# Altium PCB iDProx.PcbDoc
Units mil, origin at the board's own origin, x right, y up, seen from the top; angles counter-clockwise.
Board outline 1358.27 x 2232.28 mil, 2 copper layers (Top Layer, Bottom Layer), stack 60.8 mil thick; 59 components, 41 nets, 176 pads, 201 vias.
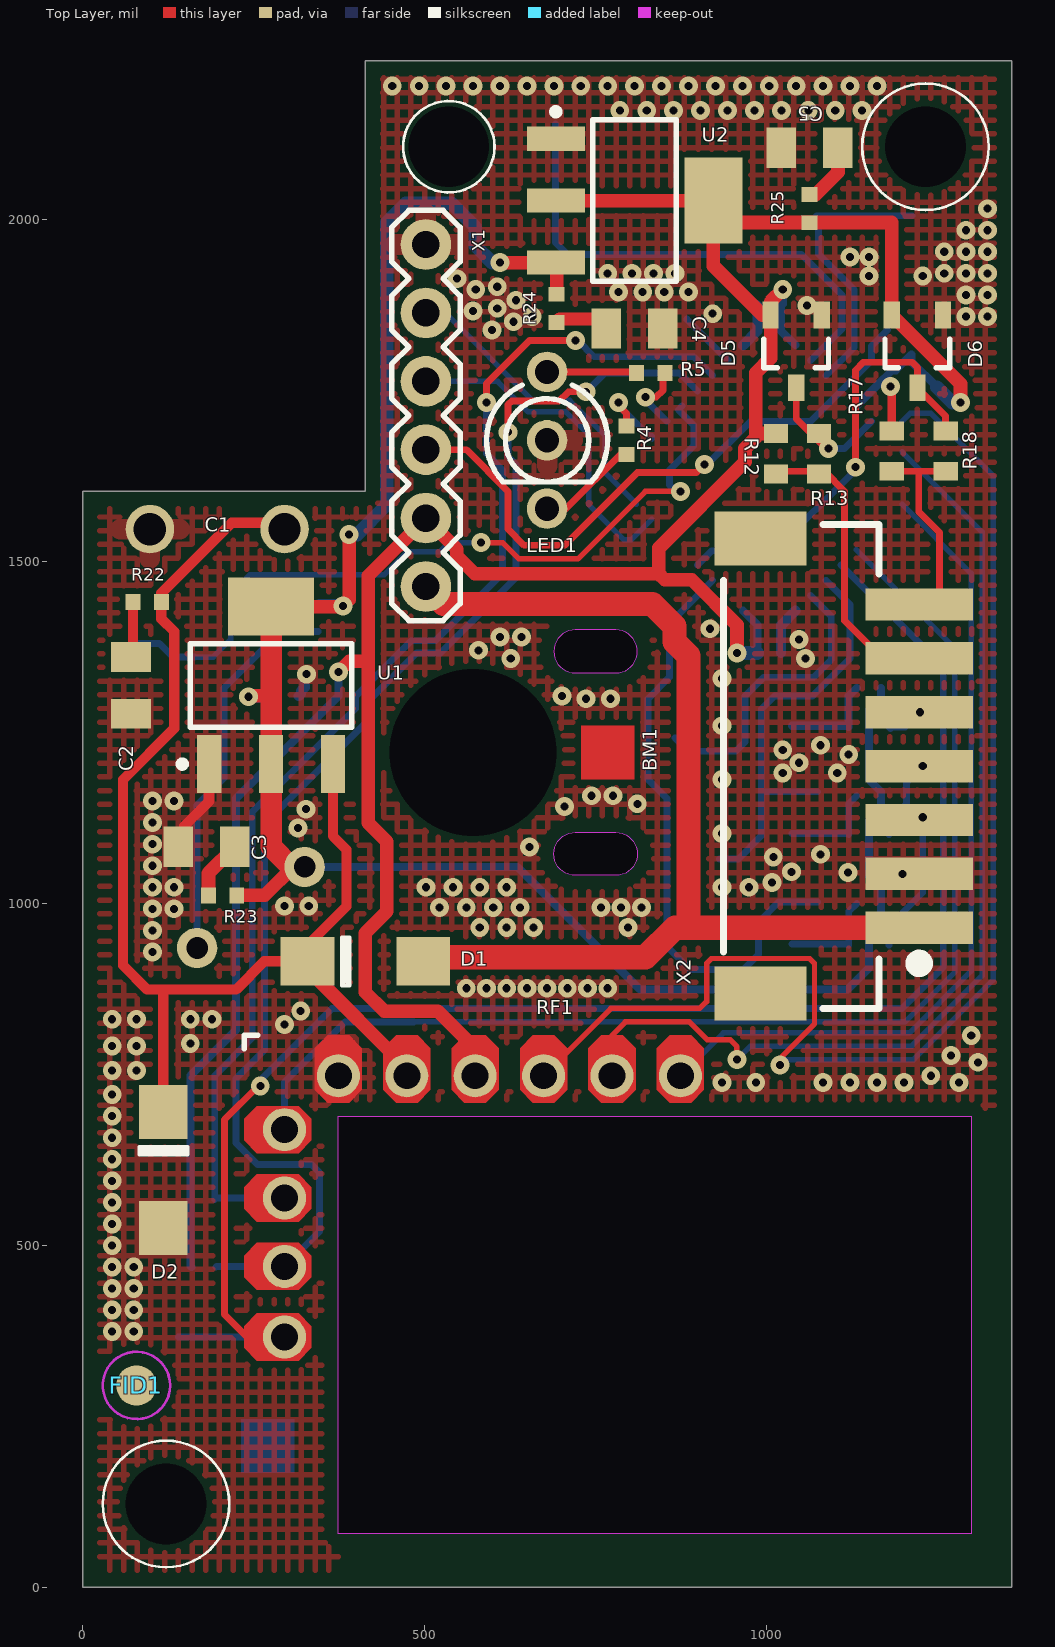
[diagram p0: Top Layer view]
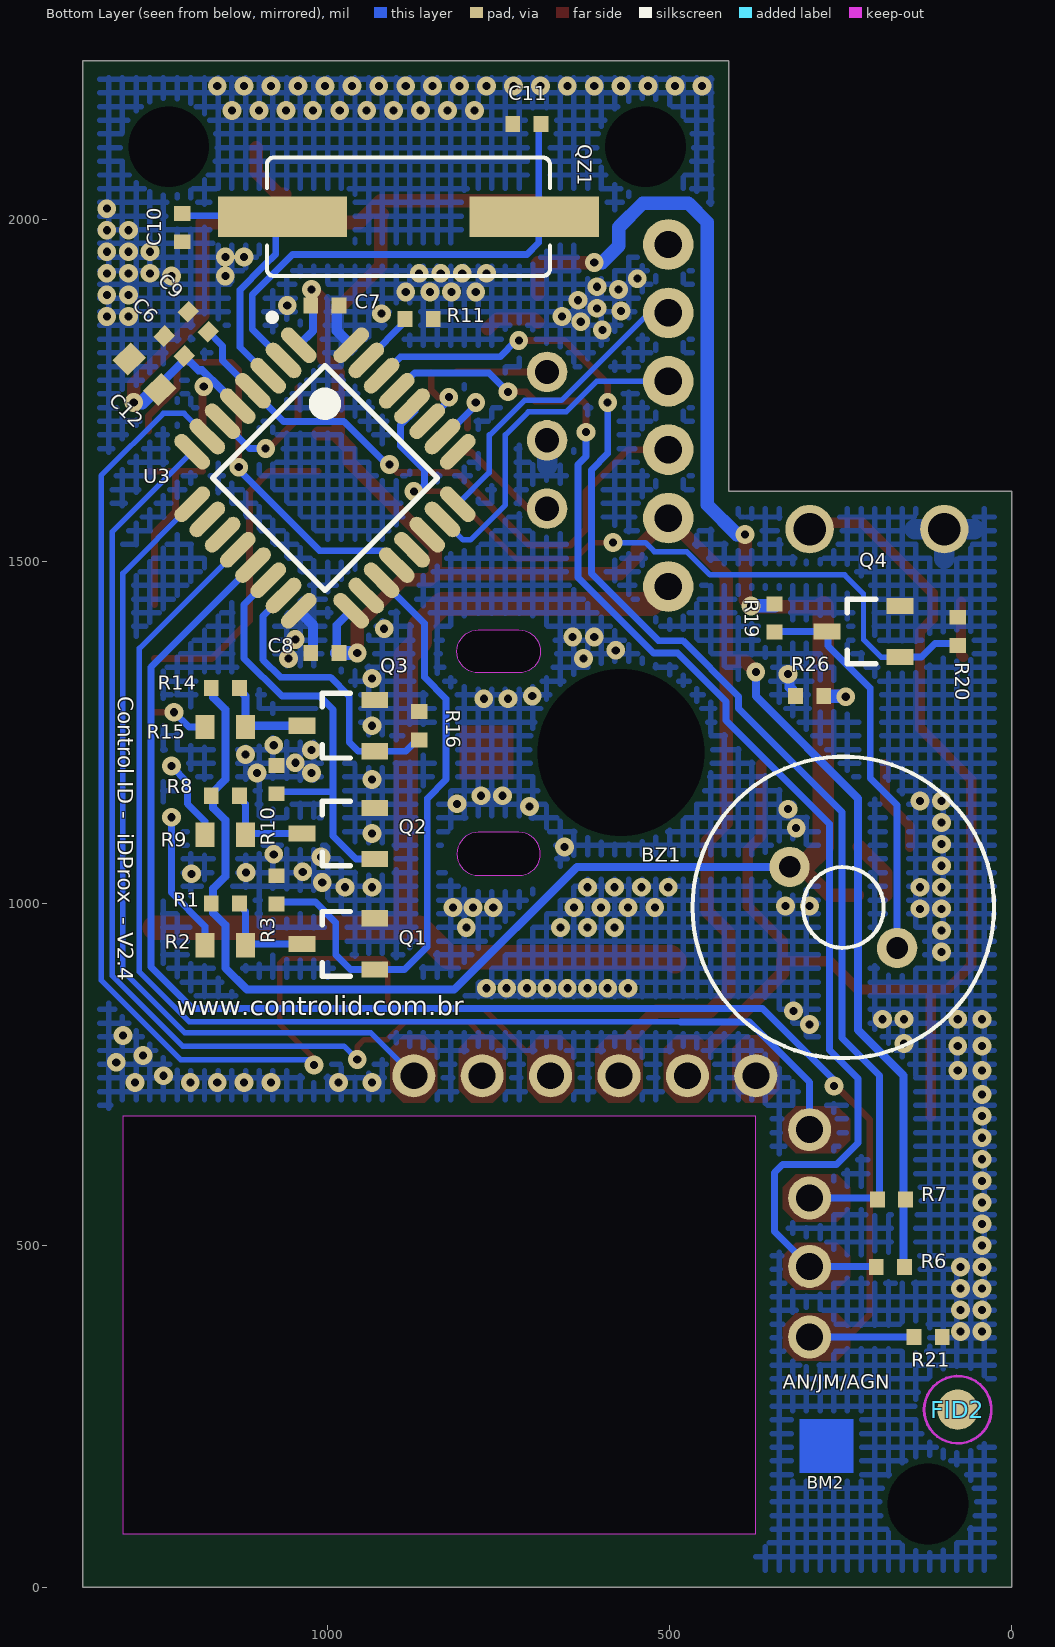
[diagram p1: Bottom Layer view, seen from below]
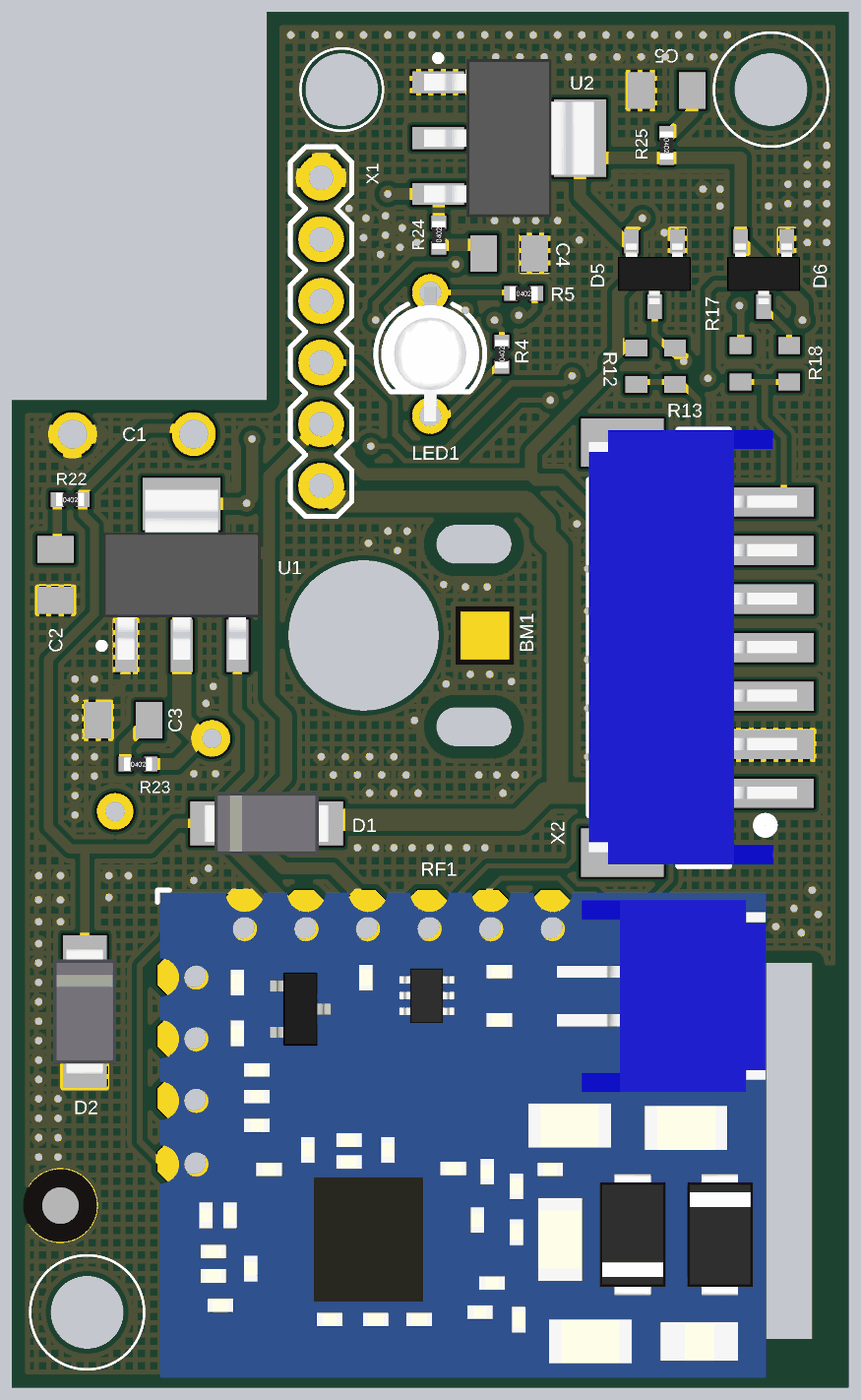
[diagram p2: 3D render of the assembled board from above, using the file's embedded part models]
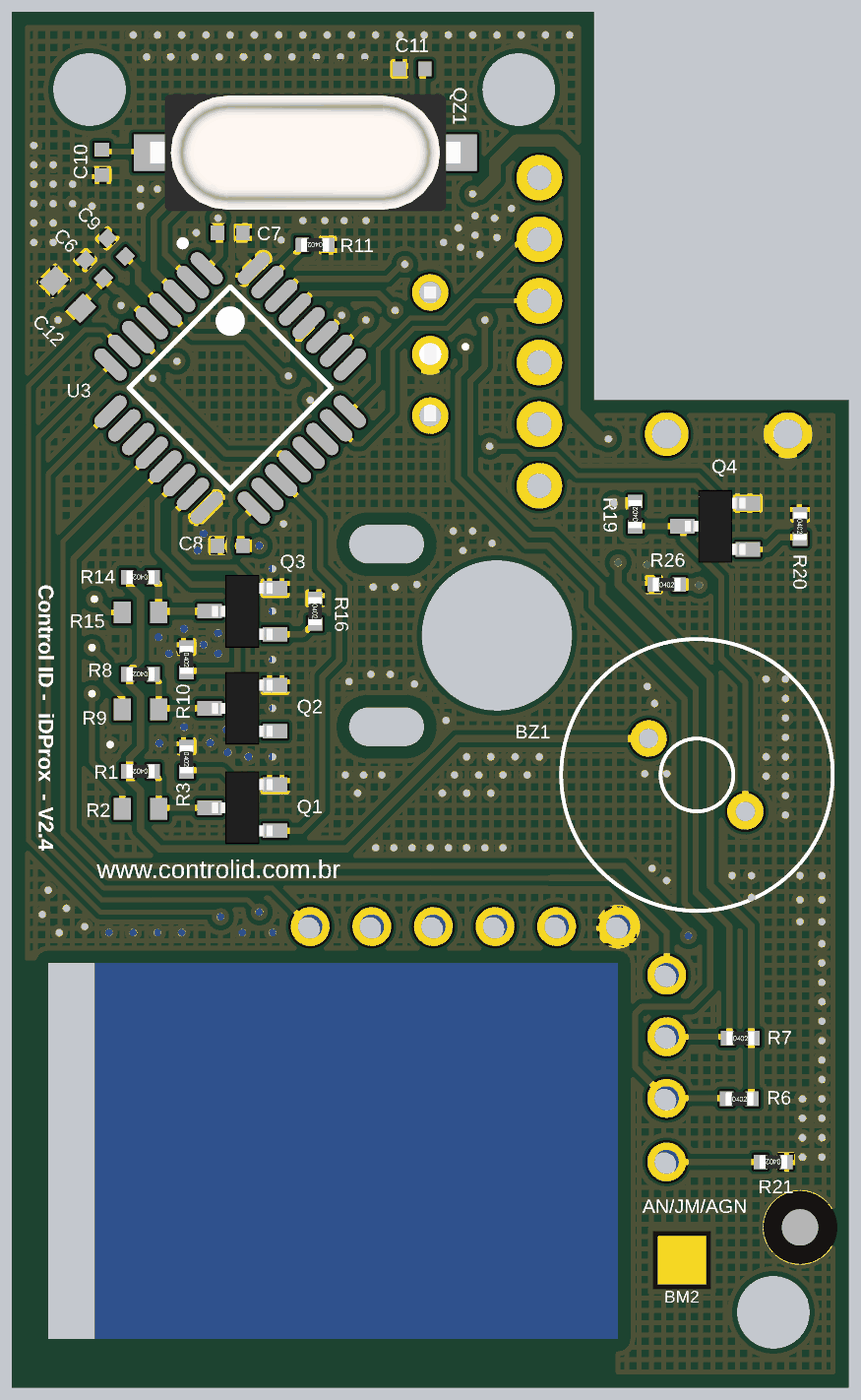
[diagram p3: 3D render of the assembled board from below, using the file's embedded part models]

## Layer stack, top to bottom
Top Solder: solder mask 0.4, Solder Resist, Dk 3.5
Top Layer: signal copper 1.4
Dielectric 1: dielectric 58, FR-4, Dk 4.8
Bottom Layer: signal copper 1.4
Bottom Solder: solder mask 0.4, Solder Resist, Dk 3.5

## Board outline
0,0 0,1602.36 413.39,1602.36 413.39,2232.28 1358.27,2232.28 1358.27,0
cut-out: 1299.21,78.74 374.02,78.74 374.02,688.98 1299.21,688.98
cut-out: 688.98,1368.53 ccw(c720.47,1368.53) 720.47,1337.03 779.53,1337.03 ccw(c779.53,1368.53) 811.02,1368.53 ccw(c779.53,1368.53) 779.53,1400.02 720.47,1400.02 ccw(c720.47,1368.53)
cut-out: 688.98,1072.42 cw(c720.47,1072.42) 720.47,1103.91 779.53,1103.91 cw(c779.53,1072.42) 811.02,1072.42 cw(c779.53,1072.42) 779.53,1040.92 720.47,1040.92 cw(c720.47,1072.42)

## Design rules (kind name [scope] priority, off if disabled: settings)
BoardOutlineClearance [All] p1: gap=19.68 ignorepadtopadclearanceinfootprint=FALSE
Clearance U1 [InComponent('U1') vs InComponent('U1')] p1: gap=0 ignorepadtopadclearanceinfootprint=FALSE
Clearance [All] p2: gap=8 ignorepadtopadclearanceinfootprint=FALSE except(0: Arc-Hole Track-Hole SMDPad-Hole THPad-Hole Via-Hole Fill-Hole Poly-Hole Region-Hole Text-Hole; 10: Poly-Poly Poly-Region Region-Region)
HoleSize [All] p1 off: absolutevalues=TRUE maxlimit=27.56 minlimit=11.81 maxpercent=80.000 minpercent=20.000
MinimumSolderMaskSliver MCU [InComponent('U3')] p1: minsoldermaskwidth=0
MinimumSolderMaskSliver [All] p2: minsoldermaskwidth=2.5
PolygonConnect PolygonConnect_1 [InComponent('BZ1') or InComponent('C1') or InComponent('LED1') or InComponent('X1')] p1: connectstyle=Relief reliefconductorwidth=30 reliefentries=4 polygonreliefangle="90 Angle" airgapwidth=8
PolygonConnect [All] p2: connectstyle=Direct reliefconductorwidth=10 reliefentries=4 polygonreliefangle="90 Angle" airgapwidth=10
RoutingVias [All] p1: holewidth=11.81 width=27.56 viastyle="Through Hole" minholewidth=11.81 minwidth=27.56 maxholewidth=196.85 maxwidth=393.7
SilkToSilkClearance [All] p1: silktosilkclearance=8
SilkToSolderMaskClearance [IsPad] p1: minsilkscreentomaskgap=1 clearancetoexposedcopper=TRUE
SolderMaskExpansion [All] p1: expansion=4
Width [All] p1: maxlimit=196.85 minlimit=7.99 preferedwidth=7.99
26 further rules are at their usual default settings.

## Components (designator, comment, footprint, x,y, rotation, side; value= is the part's Value field where it differs from the comment)
BM1 "BADMARK" BADMARK 767.72,1220.47 r0 top
BM2 "BADMARK" BADMARK 270.67,206.69 r180 bottom
BZ1 "Buzzer" BUZZER 246.06,994.09 r217 bottom locked
C1 "ESK108M016AH2AA" ESK108M016AH2AA 196.85,1551.18 r180 top locked
C2 "Cap0805" C0805 70.87,1318.9 r270 top value=10u
C3 "Cap0805" C0805 181.1,1082.68 r0 top value=10u
C4 "Cap0805" C0805 807.09,1840.55 r0 top value=10u
C5 "Cap0805" C0805 1062.99,2105 r0 top value=10u
C6 "Cap0402" C0402 1224.41,1814.96 r225 bottom value=0.1u
C7 "Cap0402" C0402 1003.94,1874.02 r0 bottom value=0.1u
C8 "Cap0402" C0402 1003.94,1366.14 r180 bottom value=0.1u
C9 "Cap0402" C0402 1188.98,1850.39 r225 bottom value=0.1u
C10 "Cap0402" C0402 1212.6,1988.19 r90 bottom value=10p
C11 "Cap0402" C0402 708.66,2139.76 r180 bottom value=10p
C12 "Cap0603" C0603 1267.72,1773.62 r225 bottom value=4.7u
D1 "B360A-13-F" SMA 413.39,915.35 r0 top
D2 "SMAJ14A" SMA 118.11,610.24 r270 top
D5 "BAT54S" SOT23-3 1043.31,1807.09 r270 top
D6 "BAT54S" SOT23-3 1220.47,1807.09 r270 top
FID1 "FIDUCIAL" FIDUCIAL-1p5X3 78.74,295.28 r90 top
FID2 "FIDUCIAL" FIDUCIAL-1p5X3 78.74,259.84 r90 bottom
LED1 "LTL1BEKVJNN" LTL1BEKVJNN 679.13,1677.17 r0 top locked
Q1 "DMN3404" SOT23-3 984.25,940.94 r0 bottom
Q2 "DMN3404" SOT23-3 984.25,1102.36 r0 bottom
Q3 "DMN3404" SOT23-3 984.25,1259.84 r0 bottom
Q4 "DMN3404" SOT23-3 216.54,1397.64 r0 bottom
QZ1 "CrystalHC49" HC49 881.89,2003.94 r0 bottom
R1 "Res0402" R0402 1149.61,1000 r0 bottom value=1k
R2 "Res0603" R0603 1122.05,921.26 r180 bottom value=100
R3 "Res0402" R0402 1074.8,1019.68 r270 bottom value=1K
R4 "Res0402" R0402 795.28,1677.17 r90 top value=120
R5 "Res0402" R0402 830.71,1775.59 r0 top value=130
R6 "Res0402" R0402 177.17,468.5 r180 bottom value=DNP
R7 "Res0402" R0402 175.59,566.93 r180 bottom value=DNP
R8 "Res0402" R0402 1149.61,1157.48 r0 bottom value=1k
R9 "Res0603" R0603 1122.05,1082.68 r180 bottom value=100
R10 "Res0402" R0402 1074.8,1181.1 r270 bottom value=1K
R11 "Res0402" R0402 866.14,1854.33 r0 bottom value=1k
R12 "Res0603" R0603 1031.5,1685.04 r90 top value=100k
R13 "Res0603" R0603 1094.49,1685.04 r90 top value=100k
R14 "Res0402" R0402 1149.61,1314.96 r0 bottom value=1k
R15 "Res0603" R0603 1122.05,1240.16 r180 bottom value=100
R16 "Res0402" R0402 866.14,1259.84 r270 bottom value=1K
R17 "Res0603" R0603 1200.79,1688.98 r90 top value=100k
R18 "Res0603" R0603 1279.53,1688.98 r90 top value=100k
R19 "Res0402" R0402 346.46,1417.32 r90 bottom value=1k
R20 "Res0402" R0402 78.74,1397.64 r270 bottom value=1K
R21 "Res0402" R0402 122.05,366.14 r0 bottom value=3k3
R22 "Res0402" R0402 94.49,1440.94 r0 top value=1
R23 "Res0402" R0402 204.72,1011.81 r0 top value=1
R24 "Res0402" R0402 692.91,1870.08 r90 top value=1
R25 "Res0402" R0402 1062.99,2015.75 r270 top value=1
R26 "Res0402" R0402 295.28,1303.15 r180 bottom value=430
RF1 "REPASK/REPMIF" REPASK_REPMIF 1220.47,807.09 r180 top locked
U1 "NCP1117LPST50T3G" SOT223 275.59,1318.9 r90 top
U2 "AP1117E33G-13" SOT223 807.09,2027.56 r0 top
U3 "STM32F030K6T6" STM-LQFP32_N 1003.94,1622.05 r225 bottom locked
X1 "Header 6" 1X06 501.97,1663.39 r90 top
X2 "JST7_HORIZ" JST7_HORIZ 1102.36,1200.79 r90 top locked

## Footprints (in the part's own frame and the unit in brackets; to place one, negate y for a bottom-side part, rotate by r counter-clockwise, add the part's x,y. Pads: shape width x height; smd on the part's side, far side on the other; paste and mask are expansions set on the pad)
1X06 [mil]
  round 74 hole 40: 1(-200,0) 2(-100,0) 3(0,0) 4(100,0) 5(200,0) 6(300,0)
  silkscreen extent -250,-50 350,50
BADMARK [mil]
  Top Layer region: -39.37,-39.37 39.37,-39.37 39.37,39.37 -39.37,39.37
BUZZER [mil]
  round 59.06 hole 31.5: 1(-98.43,0) 2(98.43,0)
  silkscreen extent -220,-220 220,220, body extent -240,-240 240,240, height 197
C0402 [mm] "Chip Capacitor, 2-Leads, Body 1,00x0,50mm, IPC Medium Density"
  rect 0.55x0.6 smd: 1(-0.525,0) 2(0.525,0)
  body extent -0.53,-0.28 0.53,0.27, height 0.55
C0603 [mm] "Chip Capacitor, 2-Leads, Body 1,60x0,80mm, IPC Medium Density"
  rect 0.8x0.95 smd: 1(-0.8,0) 2(0.8,0)
  body extent -0.85,-0.45 0.85,0.45, height 0.9
C0805 [mm] "Chip Capacitor, 2-Leads, Body 2,00x1,25mm, IPC Medium Density"
  rect 1.1x1.5 smd: 1(-1.05,0) 2(1.05,0)
  body extent -1.1,-0.72 1.1,0.72, height 1.25
ESK108M016AH2AA [mm] "CAP ALUM 1000UF 20% 16V RADIAL"
  round 1.8 hole 1.2: 1(-2.5,0.1) 2(2.5,0.1)
  body extent -4,-14 4,-2, height 4
FIDUCIAL-1p5X3 [mil]
  rrect100% 59.06x59.06 smd: 1(0,0)
HC49 [mm]
  rect 4.8x1.5 smd: 1(-4.675,0) 2(4.675,0)
  silkscreen extent -5.25,-2.2 5.25,2.2, body extent -6.4,-2.41 6.4,2.42, height 4.3
JST7_HORIZ [mm]
  rect 1.2x4 smd: 1(-6,-3.075) 2(-4,-3.075) 3(-2,-3.075) 4(0,-3.075) 5(2,-3.075) 6(4,-3.075) 7(6,-3.075)
  rect 2x3.4 smd: P1(-8.45,2.825) P2(8.45,2.825)
  silkscreen extent -9,-3.33 8.97,4.2, body extent -8.93,-4.39 8.97,4.21, height 5.5
LTL1BEKVJNN [mm] "LED GRN/RED DIFF 3MM ROUND T/H"
  round 1.5 hole 0.9: 1(0,-2.54) 2(0,0) 3(0,2.54)
  silkscreen extent -2.25,-1.55 2.25,2.05, body extent -2.02,-2.79 2.02,2.79, height 7.51
R0402 [mm] "Chip Resistor, 2-Leads, Body 1,00x0,50mm, IPC Medium Density"
  rect 0.55x0.6 smd: 1(-0.525,0) 2(0.525,0)
  body extent -0.57,-0.27 0.58,0.28, height 0.41
R0603 [mm] "Chip Resistor, 2-Leads, Body 1.60x0.80mm, IPC Medium Density"
  rect 0.7x0.9 smd: 1(-1.45,0.45) 2(0.05,0.45)
  body extent -1.55,0 0.15,0.9, height 0.45
REPASK_REPMIF [mm]
  round 1.6 hole 1: 1(18.96,1.5) 2(16.42,1.5) 3(23.5,3.5) 4(23.5,6.04) 5(23.5,8.58) 6(23.5,11.2) 7(13.88,1.5) 8(11.34,1.5) 9(8.8,1.5) 10(21.5,1.5)
  Top Layer region: 10.94,0 11.74,0 12.215,0.475 12.215,2.025 11.74,2.5 10.94,2.5 10.465,2.025 10.465,0.475
  Top Layer region: 13.48,0 14.28,0 14.755,0.475 14.755,2.025 14.28,2.5 13.48,2.5 13.005,2.025 13.005,0.475
  Top Layer region: 16.02,0 16.82,0 17.295,0.475 17.295,2.025 16.82,2.5 16.02,2.5 15.545,2.025 15.545,0.475
  Top Layer region: 18.56,0 19.36,0 19.835,0.475 19.835,2.025 19.36,2.5 18.56,2.5 18.085,2.025 18.085,0.475
  Top Layer region: 21.1,0 21.9,0 22.375,0.475 22.375,2.025 21.9,2.5 21.1,2.5 20.625,2.025 20.625,0.475
  Top Layer region: 25,3.1 25,3.9 24.525,4.375 22.975,4.375 22.5,3.9 22.5,3.1 22.975,2.625 24.525,2.625
  Top Layer region: 25,5.64 25,6.44 24.525,6.915 22.975,6.915 22.5,6.44 22.5,5.64 22.975,5.165 24.525,5.165
  Top Layer region: 25,8.18 25,8.98 24.525,9.455 22.975,9.455 22.5,8.98 22.5,8.18 22.975,7.705 24.525,7.705
  Top Layer region: 25,10.8 25,11.6 24.525,12.075 22.975,12.075 22.5,11.6 22.5,10.8 22.975,10.325 24.525,10.325
  Top Layer region: 8.4,0 9.2,0 9.675,0.475 9.675,2.025 9.2,2.5 8.4,2.5 7.925,2.025 7.925,0.475
  silkscreen extent 24.5,0 25,0.5, body extent -0.1,0.04 24.9,20.1, height 9.7
SMA [mm]
  rect 2x1.8 smd: 1(2.15,0) 2(-2.15,0)
  silkscreen extent -0.88,-0.9 -0.58,0.9, body extent -2.6,-1.3 2.6,1.3, height 2.45
SOT23-3 [mm]
  rect 1x0.6 smd: 1(1.35,0) 2(-1.35,0.95) 3(-1.35,-0.95)
  silkscreen extent -0.45,-1.2 0.6,1.2, body extent -1.25,-1.5 1.25,1.5, height 1.1
SOT223 [mm] "SOT223, 4-Leads, Body 6,50x7,00mm (avg), Pitch 2,30mm, IPC Medium Density"
  rect 2.15x0.9 smd: 1(-2.925,2.3) 2(-2.925,0) 3(-2.925,-2.3)
  rect 2.15x3.2 smd: 2(2.925,0)
  silkscreen extent -3.05,-3 1.55,3.42, body extent -3.5,-3.25 3.5,3.25, height 1.65
STM-LQFP32_N [mm] "QFP, 32-Leads, Body 7x7mm, Pitch 0.8mm, IPC Medium Density"
  oval 1.65x0.55 smd: 1(-4.175,2.8) 2(-4.175,2) 3(-4.175,1.2) 4(-4.175,0.4) 5(-4.175,-0.4) 6(-4.175,-1.2) 7(-4.175,-2) 8(-4.175,-2.8) 17(4.175,-2.8) 18(4.175,-2) 19(4.175,-1.2) 20(4.175,-0.4) 21(4.175,0.4) 22(4.175,1.2) 23(4.175,2) 24(4.175,2.8)
  oval 0.55x1.65 smd: 9(-2.8,-4.175) 10(-2,-4.175) 11(-1.2,-4.175) 12(-0.4,-4.175) 13(0.4,-4.175) 14(1.2,-4.175) 15(2,-4.175) 16(2.8,-4.175) 25(2.8,4.175) 26(2,4.175) 27(1.2,4.175) 28(0.4,4.175) 29(-0.4,4.175) 30(-1.2,4.175) 31(-2,4.175) 32(-2.8,4.175)
  silkscreen extent -5.73,-2.95 2.95,2.96, body extent -3.5,-3.5 3.5,3.5, height 1.6

## Part data
BM1 BM2: "Bad Mark Indicator"
BZ1: "Standard PTH Buzzer"
C1: "CAP ALUM 1000UF 20% 16V RADIAL", Capacitance=1000µF, ESR (Equivalent Series Resistance)=-, Lifetime @ Temp.="2000 Hrs @ 85°C", Manufacturer=Kemet, Operating Temperature="-40°C ~ 85°C", Package / Case="Radial, Can", Ripple Current="630mA @ 120Hz", Supplier Part Number 1=399-6106-ND, Tolerance=±20%, Voltage Rating=16V, Applications="General Purpose", Category=Capacitors, ComponentLink1Description=http://capacitoredge.kemet.com/capedge2/DataSheet?pn=ESK108M016AH2AA, ComponentLink1URL=http://capacitoredge.kemet.com/capedge2/DataSheet?pn=ESK108M016AH2AA, Height - Seated (Max)="0.669\" (17.00mm)", Impedance=-, Lead Spacing="0.197\" (5.00mm)", Manufacturer Part Number=ESK108M016AH2AA, Mounting Type="Through Hole", Packaging=Bulk, Polarization=Polar, Pricing 1="1=0.43, 10=0.298, 50=0.2086, 100=0.1788, 250=0.149, 500=0.1341, 1000=0.11324, 2500=0.10728, 5000=0.10132 (USD)", RoHS="RoHS Compliant", Size / Dimension="0.394\" Dia (10.00mm)", Stock 1=2866, Supplier 1=Digi-Key, Surface Mount Land Size=-
C2 C3 C4 C5 C6 C7 C8 C9 C10 C11 C12: "Capacitor", Tolerance=10%
  C2 C3 C4 C5: MAX VDC=25V
  C6 C7 C8 C9 C10 C11: MAX VDC=10V
  C12: MAX VDC=6.3V
D1: library part B360A, "B360A Diode", Capacitance @ Vr, F="200pF @ 4V, 1MHz", Current - Average Rectified (Io)=3A, Current - Reverse Leakage @ Vr="500µA @ 60V", Manufacturer="Diodes Incorporated", Operating Temperature - Junction="-55°C ~ 150°C", Package / Case="DO-214AC, SMA", Supplier Device Package=SMA, Supplier Part Number 1=B360A-FDICT-ND, Voltage - DC Reverse (Vr) (Max)=60V, Voltage - Forward (Vf) (Max) @ If="700mV @ 3A", Category="Discrete Semiconductor Products", ComponentLink1Description=http://www.diodes.com/_files/datasheets/ds30891.pdf, ComponentLink1URL=http://www.diodes.com/_files/datasheets/ds30891.pdf, Diode Type=Schottky, Manufacturer Part Number=B360A-13-F, Mounting Type="Surface Mount", Packaging="Cut Tape (CT)", Pricing 1="1=0.5, 10=0.394, 25=0.3324, 100=0.2708, 250=0.22424, 500=0.18526, 1000=0.13875, 2500=0.1275 (USD)", Reverse Recovery Time (trr)=-, RoHS="RoHS Compliant", Speed="Fast Recovery =< 500ns, > 200mA (Io)", Stock 1=132804, Supplier 1=Digi-Key
D2: "TVS DIODE 14VWM 23.2VC SMA", Capacitance @ Frequency=-, Current - Peak Pulse (10/1000µs)=17.2A, Manufacturer="Littelfuse Inc.", Operating Temperature="-55°C ~ 150°C (TJ)", Package / Case="DO-214AC, SMA", Power - Peak Pulse=400W, Power Line Protection=No, Supplier Device Package="DO-214AC (SMA)", Supplier Part Number 1=SMAJ14ALFCT-ND, Voltage - Breakdown (Min)=15.6V, Voltage - Clamping (Max) @ Ipp=23.2V, Voltage - Reverse Standoff (Typ)=14V, Applications="General Purpose", Bidirectional Channels=-, Category="Circuit Protection", ComponentLink1Description=http://www.littelfuse.com/~/media/electronics/datasheets/tvs_diodes/littelfuse_tvs_diode_smaj_datasheet.pdf.pdf, ComponentLink1URL=http://www.littelfuse.com/~/media/electronics/datasheets/tvs_diodes/littelfuse_tvs_diode_smaj_datasheet.pdf.pdf, Manufacturer Part Number=SMAJ14A, Mounting Type="Surface Mount", Packaging="Cut Tape (CT)", Pricing 1="1=0.43, 10=0.36, 25=0.3156, 100=0.2701, 250=0.23424, 500=0.1984, 1000=0.15295, 2500=0.13984 (USD)", RoHS="RoHS Compliant", Stock 1=42648, Supplier 1=Digi-Key, Type=Zener, Unidirectional Channels=1
D5 D6: "DIODE ARRAY SCHOTTKY 30V SOT23"
FID1 FID2: "Standard fiducial for Control iD boards"
LED1: "LED GRN/RED DIFF 3MM ROUND T/H", Color="Green, Red", Current - Test="20mA Green, 20mA Red", Lens Color=White, Manufacturer="Lite-On Inc.", Millicandela Rating="110mcd Green, 110mcd Red", Package / Case="Radial - 3 Leads", Supplier Device Package=-, Supplier Part Number 1=160-1939-ND, Voltage - Forward (Vf) (Typ)="2.1V Green, 2V Red", Category=Optoelectronics, ComponentLink1Description=http://optoelectronics.liteon.com/upload/download/DS20-2001-645/S_110_LTL1BEKVJNN.pdf, ComponentLink1URL=http://optoelectronics.liteon.com/upload/download/DS20-2001-645/S_110_LTL1BEKVJNN.pdf, Features=-, Height (Max)=5.15mm, Lens Style/Size="Round with Domed Top, 3.00mm", Lens Transparency=Diffused, Manufacturer Part Number=LTL1BEKVJNN, Mounting Type="Through Hole", Packaging=Bulk, Pricing 1="1=0.47, 10=0.332, 100=0.2216, 250=0.18004, 500=0.13296, 1000=0.1108, 2500=0.09972, 5000=0.09418, 10000=0.08587 (USD)", RoHS="RoHS Compliant", Size / Dimension=-, Stock 1=19364, Supplier 1=Digi-Key, Viewing Angle=45°, Wavelength - Dominant="572nm Green, 631nm Red", Wavelength - Peak="575nm Green, 639nm Red"
Q1 Q2 Q3 Q4: "DMN3404 N-Channel MOSFET", Supplier Part Number 1=DMN3404LDICT-ND, Supplier 1=Digi-Key
R1 R2 R3 R4 R5 R6 R7 R8 R9 R10 R11 R12 R13 R14 R15 R16 R17 R18 R19 R20 R21 R22 R23 R24 R25 R26: "Resistor", Tolerance=5%
RF1: "Control iD RF Module"
U1: "IC REG LDO 5V 1A SOT223", Current - Limit (Min)=1.1A, Current - Output=1A, Manufacturer="ON Semiconductor", Operating Temperature="0°C ~ 125°C", Package / Case="TO-261-4, TO-261AA", Supplier Device Package=SOT-223, Supplier Part Number 1=NCP1117LPST50T3GOSCT-ND, Voltage - Dropout (Typical)="1.3V @ 1A", Voltage - Input="Up to 18V", Voltage - Output=5V, Category="Integrated Circuits (ICs)", ComponentLink1Description=http://www.onsemi.com/pub_link/Collateral/NCP1117LP-D.PDF, ComponentLink1URL=http://www.onsemi.com/pub_link/Collateral/NCP1117LP-D.PDF, Manufacturer Part Number=NCP1117LPST50T3G, Mounting Type="Surface Mount", Number of Regulators=1, Packaging="Cut Tape (CT)", Pricing 1="1=0.45, 10=0.362, 100=0.2468, 500=0.18476, 1000=0.13838 (USD)", Regulator Topology="Positive Fixed", RoHS="RoHS Compliant", Stock 1=6004, Supplier 1=Digi-Key
U3: "ARM Cortex-M0 32-bit MCU, 32 KB Flash, 4 KB Internal RAM, 26 I/Os, 32-pin LQFP, -40 to 85 degC, Tray", I/Os (High Current)=26, Operating Frequency(F) (Processor speed) (MHz)=48, Supplier Part Number 1=497-14046-ND, Supply Voltage(Vcc) min (V)=2.4, ComponentLink1Description="Manufacturer URL", ComponentLink1URL=http://www.st.com/web/en/home.html, ComponentLink2Description=Datasheet, ComponentLink2URL=http://www.st.com/st-web-ui/static/active/en/resource/technical/document/datasheet/DM00088500.pdf, ComponentLink3Description="Package Specification", ComponentLink3URL=http://www.st.com/st-web-ui/static/active/en/resource/technical/document/datasheet/DM00088500.pdf, Core="ARM Cortex-M0", DatasheetVersion="Rev. 1", FLASH Size (Prog) (kB)=32, Internal RAM Size (kB)=4, Mounting Technology="Surface Mount", PackageDescription="32-Pin Low Profile Quad Flat Package, 7 x 7 mm Body, 0.8 mm Pitch", PackageReference=LQFP32, PackageVersion="Rev. 1, 07/2013", Packing=Tray, PartNumber=STM32F030K6T6, Supplier 1=Digi-Key, Supplier 2=Newark, Supplier 3=Mouser, Supplier Part Number 2=19X6194, Supplier Part Number 3=511-STM32F030K6T6
X1: "Header, 6-Pin, Single row, 0.1\""

## Free pads (board coordinates)
  round 0 hole 118.11 unplated: 2(122.05,122.05) 2(535.43,2106.3) 2(1232.28,2106.3)
  round 0 hole 244.09 unplated: 2(570.87,1220.47)

## Via types
v1: diameter 27.56, hole 11.81, Top Layer to Bottom Layer, tented both sides, 201 vias

## Nets (pads, with @x,y where several pads share a name; then routed paths per layer and width w, separated by ;. In a path a pad name is that pad's centre, name@x,y a point inside that pad or via, vN(x,y) a via of type N, cw(c..) or ccw(c..) an arc to the next point about the centre after c; other vN are vias at no path point)
5V: BZ1.1 R1.2 R8.2 R14.2 R19.2 R23.2 R24.2 R26.2 U1.2 U2.3 | length 3031.4
  Top Layer w19.68: R23.2 266.3,1011.81 307.82,1053.33 BZ1.1 ; v1(242.5,1302.15) 244,1303.66 265.27,1303.66 275.59,1313.98 ; U1.2@275.59,1434.06 379.92,1434.06 v1(380.91,1435.04) 389.76,1443.9 v1(389.76,1539.37) ; v1(610.24,1937.01) U2.3 692.91,1936.02 R24.2
  Top Layer w31.5: U1.2@275.59,1434.06 275.59,1313.98 275.59,1203.74 275.59,1082.68 304.94,1053.33 BZ1.1@307.82,1053.33
  Bottom Layer w11.81: BZ1.1 635.65,1053.33 814.96,874.02 1118.11,874.02 1149.61,905.51 1149.61,968.5 1167.32,986.22 1167.32,1021.65 1149.61,1039.37 1149.61,1122.05 1167.32,1139.76 1167.32,1163.37 1149.61,1181.08 1149.61,1283.46 1167.32,1301.18 R14.2@1167.32,1314.96
  Bottom Layer w19.68: v1@243.5,1303.15 R26.2 ; R19.2@346.46,1435.04 v1(380.91,1435.04) ; v1(389.76,1539.37) 401.57,1539.37 444.88,1582.68 444.88,1996.06 472.44,2023.62 539.37,2023.62 574.05,1988.94 574.05,1961.55 598.59,1937.01 v1(610.24,1937.01)
125KHZ: RF1.3 U3.12 | length 1792.9
  Bottom Layer w8: 484.25,826.77 1202.2,826.77 1275.34,899.91 1275.34,1372.92 U3.12
  Bottom Layer w10: RF1.3 295.28,738.6 383.44,826.77 484.25,826.77
+3V3: C6.2 C7.2 C8.2 C12.2 D5.3 D6.3 R6.2 R7.2 R12.2 R17.2 R25.2 RF1.2 U2.2 U3.1 U3.5 U3.17 X1.2 | length 4579.9
  Top Layer w11.81: v1(1181.1,1755.91) 1183.07,1753.94 R17.2
  Top Layer w19.68: v1(374.02,1338.58) 389.76,1354.33 417.32,1354.33 ; RF1.2 574.02,787.94 519.31,842.65 440.82,842.65 413.39,870.08 413.39,956.69 444.88,988.19 444.88,1090.55 417.32,1118.11 417.32,1354.33 ; 842.52,1481.88 573.24,1481.88 547.24,1507.87 547.24,1518.11 X1.2 417.45,1478.87 417.45,1354.46 417.32,1354.33
  Top Layer w20: U2.2@691.93,2027.56 922.24,2027.56 954.13,1995.67 1183.07,1995.67 D6.3 1283.46,1759.84 v1(1283.46,1732.28) ; U2.2@920.57,2008.02 U2.2@923.89,2008.3 ; U2.2@922.24,2007.87 922.24,1932.09 994.09,1860.24 D5.3 ; v1(956.69,1366.14) 956.69,1407.15 890.62,1473.22 851.18,1473.22 842.52,1481.88 842.52,1519.69 968.5,1645.67 968.5,1665.35 984.25,1681.1 984.25,1687.01 ; R12.2 984.25,1687.01 ; v1(1023.62,1897.64) 1005.91,1879.92 D5.3 ; 984.25,1687.01 984.25,1775.59 1005.91,1797.24 D5.3
  Bottom Layer w11.81: R6.2@159.45,468.5 157.87,470.08 157.87,748.42 224.41,814.96 224.41,1153.54 374.02,1303.15 v1(374.02,1338.58) ; U3.17 986.61,1406.92 C8.2@986.61,1366.14 ; v1(1023.62,1897.64) 1023.62,1876.38 1021.26,1874.02 1021.26,1837.18 U3.1 ; U3.5 1169.29,1765.13 1181.1,1753.32 v1(1181.1,1755.91) ; 1170.58,1766.42 1183.69,1779.53 1188.98,1779.53 C6.2 1212.16,1802.71 1212.16,1791.6 C12.2@1248.93,1754.83
  Bottom Layer w20: v1(956.69,1366.14) C8.2@986.61,1366.14 ; C12.2@1248.93,1754.83 1271.47,1732.28 v1(1283.46,1732.28)
+12V: C1.1 D1.2 D2.2 R22.2 RF1.1 U1.3 | length 1841
  Top Layer w15: D2.2@118.11,688.98 118.11,874.02 ; C1.1@295.28,1556.69 218.11,1556.69 115.16,1453.74 R22.2 115.16,1416.34 133.86,1397.64 133.86,1255.91 59.06,1181.1 59.06,909.45 94.49,874.02 224.41,874.02 265.75,915.35 334.65,915.35 334.65,944.88 385.83,996.06 385.83,1078.74 366.14,1098.43 U1.3
  Top Layer w19.68: D1.2@334.65,915.35 334.65,898.35 474.02,758.98 RF1.1
B0: RF1.7 U3.7 | length 1980
  Top Layer w8: RF1.7 772.44,846.46 902.18,846.46 912.21,856.49 912.21,912.45 919.24,919.48 1063.04,919.48 1070.07,912.45 1070.07,823.77 1019.69,773.38 v1(1019.69,763.78)
  Bottom Layer w8: v1(1019.69,763.78) 1027.56,771.65 1214.97,771.65 1331.21,887.9 1331.21,1625.48 1240.16,1716.54 1209.78,1716.54 U3.7
B1: RF1.8 U3.8 | length 1507.8
  Top Layer w8: RF1.8 774.02,807.23 793.56,826.77 887.05,826.77 913.08,800.74 946.79,800.74 956.69,790.83 v1(956.69,771.65)
  Bottom Layer w8: v1(956.69,771.65) 976.38,791.34 1212.02,791.34 1315.21,894.53 1315.21,1543.23 U3.8
B2: RF1.9 U3.9 | length 1213.1
  Bottom Layer w8: RF1.9 936.76,810.77 1208.83,810.77 1299.21,901.16 1299.21,1482.67 U3.9
GND: C1.2 C2.2 C3.1 C4.2 C5.1 C6.1 C7.1 C8.1 C9.1 C10.1 C11.1 C12.1 D2.1 D5.2 D6.2 LED1.2 Q1.3 Q2.3 Q3.3 Q4.3 R3.1 R10.1 R11.1 R16.1 R20.1 R21.1 R26.1 RF1.10 U1.1 U2.1 U3.16 U3.32 X1.6 X2.2 | length 309.7
  Top Layer w15: C3.1@148.62,1082.68 148.62,1113.19 185.04,1149.61 U1.1
  Bottom Layer w15: R26.1 319.27,1306.48 319.27,1310.75 324.77,1316.25 324.77,1332.76 v1(327.17,1335.16) ; U3.32 986.61,1837.18 C7.1@986.61,1874.02 ; C8.1@1021.26,1366.14 1021.26,1406.92 U3.16
  other v1: 43.31,374.02 74.8,374.02 43.31,405.51 74.8,405.51 43.31,437.01 74.8,437.01 43.31,468.5 74.8,468.5 43.31,500 43.31,531.5 43.31,562.99 43.31,594.49 43.31,625.98 43.31,657.48 43.31,688.98 43.31,720.47 935.04,738.19 984.25,738.19 1082.68,738.19 1122.05,738.19 1161.42,738.19 1200.79,738.19 1281.55,738.12 1240.16,748.03 43.31,755.91 78.74,755.91 1309.06,767.72 1269.69,777.56 43.31,791.34 78.74,791.34 157.48,795.28 1299.21,807.09 295.28,822.83 43.31,830.71 78.74,830.71 157.48,830.71 188.98,830.71 318.9,842.52 561.02,875.98 590.55,875.98 620.08,875.98 649.61,875.98 679.13,875.98 708.66,875.98 738.19,875.98 767.72,875.98 102.36,929.13 102.36,960.63 580.71,964.57 620.08,964.57 659.45,964.57 797.24,964.57 102.36,992.13 133.86,992.13 521.65,994.09 561.02,994.09 600.39,994.09 639.76,994.09 757.87,994.09 787.4,994.09 816.93,994.09 295.28,996.06 330.71,996.06 102.36,1023.62 133.86,1023.62 501.97,1023.62 541.34,1023.62 580.71,1023.62 620.08,1023.62 935.04,1023.62 974.41,1023.62 1007.87,1030.51 1198.82,1043.31 1119.09,1045.28 1036.42,1046.26 102.36,1055.12 1009.84,1067.91 1078.74,1071.85 653.54,1082.68 102.36,1086.61 935.04,1102.36 314.96,1110.24 102.36,1118.11 326.77,1137.8 704.72,1141.73 811.02,1145.67 102.36,1149.61 133.86,1149.61 744.09,1157.48 775.59,1157.48 935.04,1181.1 1023.62,1190.94 1103.35,1190.94 1047.24,1205.71 1120.08,1217.52 1023.62,1224.41 1078.74,1231.3 935.04,1259.84 736.22,1299.21 771.65,1299.21 700.79,1303.15 935.04,1328.74 625.98,1358.27 1057.09,1358.27 578.74,1370.08 1047.24,1385.83 610.24,1389.76 641.73,1389.76 917.32,1401.57 598.43,1838.58 629.92,1850.39 657.48,1858.27 1291.34,1858.27 1322.83,1858.27 921.26,1862.2 570.87,1866.14 606.3,1870.08 1059.06,1874.02 633.86,1881.89 1291.34,1889.76 1322.83,1889.76 783.46,1893.7 818.9,1893.7 850.39,1893.7 885.83,1893.7 574.8,1897.64 606.3,1901.57 547.24,1913.39 1149.61,1917.32 1228.35,1917.32 767.72,1921.26 803.15,1921.26 834.65,1921.26 866.14,1921.26 1259.84,1921.26 1291.34,1921.26 1322.83,1921.26 1122.05,1944.88 1149.61,1944.88 1259.84,1952.76 1291.34,1952.76 1322.83,1952.76 1291.34,1984.25 1322.83,1984.25 1322.83,2015.75 785.43,2159.45 824.8,2159.45 864.17,2159.45 903.54,2159.45 942.91,2159.45 982.28,2159.45 1021.65,2159.45 1061.02,2159.45 1100.39,2159.45 1139.76,2159.45 452.76,2194.88 492.13,2194.88 531.5,2194.88 570.87,2194.88 610.24,2194.88 649.61,2194.88 688.98,2194.88 728.35,2194.88 767.72,2194.88 807.09,2194.88 846.46,2194.88 885.83,2194.88 925.2,2194.88 964.57,2194.88 1003.94,2194.88 1043.31,2194.88 1082.68,2194.88 1122.05,2194.88 1161.42,2194.88
I2C-SCL: R6.1 RF1.5 U3.29 | length 1980.6
  Top Layer w10: v1(622.05,1688.98) 622.05,1729.12 627.56,1734.64 696.75,1734.64 710.14,1748.03 v1(736.22,1748.03)
  Bottom Layer w10: R6.1@194.88,468.5 195.67,469.29 RF1.5 346.46,520.47 346.46,606.3 334.65,618.11 255.91,618.11 224.41,649.61 224.41,744.09 266.03,785.72 266.03,1116.43 417.32,1267.72 417.32,1295.28 488.19,1366.14 523.62,1366.14 633.86,1476.38 633.86,1641.73 622.05,1653.54 v1(622.05,1688.98) ; v1(736.22,1748.03) 763.78,1775.59 872.66,1775.59 U3.29
I2C-SDA: R7.1 RF1.4 U3.30 | length 1875.2
  Top Layer w10: v1(590.55,1732.28) 590.55,1759.84 653.54,1822.83 v1(720.47,1822.83)
  Bottom Layer w10: R7.1@193.31,566.93 193.31,748.42 248.03,803.15 248.03,1133.86 399.32,1285.15 399.32,1302.73 480.73,1384.14 516.17,1384.14 614.17,1482.15 614.17,1633.86 590.55,1657.48 v1(590.55,1732.28) ; R7.1@195.67,569.29 RF1.4 ; v1(720.47,1822.83) 724.41,1822.83 748.03,1799.21 893.58,1799.21 U3.30
NetBZ1_2: BZ1.2 Q4.1 R19.1 | length 579.9
  Bottom Layer w10: BZ1.2 167.45,1143.83 206.69,1183.07 206.69,1315.11 268.27,1376.68 268.27,1396.22 Q4.1 R19.1@344.49,1397.64
NetC2_1: C2.1 R22.1 | length 81.9
  Top Layer w15: C2.1 73.82,1363.19 R22.1
NetC3_2: C3.2 R23.1 | length 86.8
  Top Layer w20: R23.1 184.06,1044.29 C3.2
NetC4_1: C4.1 R24.1 | length 80.7
  Top Layer w19.68: R24.1 697.96,1854.45 751.85,1854.45 C4.1
NetC5_2: C5.2 R25.1 | length 90.9
  Top Layer w20: R25.1 1071.85,2036.42 1104.33,2068.9 C5.2
NetC9_2: C9.2 U3.4 X1.3 | length 913.1
  Top Layer w10: X1.3 561.02,1663.39 622.05,1602.36 622.05,1547.24 645.67,1523.62 704.72,1523.62 811.02,1629.92 897.63,1629.92 v1(909.44,1641.73)
  Bottom Layer w10: v1(909.44,1641.73) 909.44,1637.79 976.37,1704.72 1064.34,1704.72 U3.4 1153.54,1793.92 1153.54,1814.96 C9.2@1176.73,1838.14
NetC10_2: C10.2 QZ1.2 U3.3 | length 408.6
  Bottom Layer w10: QZ1.2@1071.89,2003.94 1073.46,2005.51 C10.2@1212.6,2005.51 ; QZ1.2@1075.83,2000 1075.83,1949.63 1093.44,1932.02 1128.24,1897.22 1128.24,1813.16 U3.3
NetC11_2: C11.2 QZ1.1 U3.2 | length 738.9
  Bottom Layer w10: C11.2@691.34,2139.76 691.34,1966.14 708.66,1948.82 1051.18,1948.82 1110.24,1889.76 1110.24,1839.7 U3.2
NetD5_1: D5.1 R13.2 U3.6 | length 189.8
  Top Layer w10: D5.1 1043.31,1708.66 1086.61,1665.35 v1(1090.55,1665.35)
  Bottom Layer w10: v1(1090.55,1665.35) 1114.06,1665.35 U3.6
NetD6_1: D6.1 R18.2 U3.20 | length 642.6
  Top Layer w10: v1(1129.92,1637.8) 1129.92,1779.53 1141.73,1791.34 1212.42,1791.34 1220.47,1783.28 D6.1 1261.81,1712.6 R18.2
  Bottom Layer w10: U3.20 919.91,1515.75 1011.81,1515.75 1129.92,1633.86 v1(1129.92,1637.8)
NetLED1_1: LED1.1 R4.1 | length 150.2
  Top Layer w10: LED1.1 707.09,1577.17 789.37,1659.45 R4.1@795.28,1659.45
NetLED1_3: LED1.3 R5.1 | length 132.3
  Top Layer w10: LED1.3 R5.1@811.42,1777.17
NetQ1_1: Q1.1 R1.1 R2.2 | length 149.4
  Bottom Layer w10: Q1.1 1118.11,940.94 R2.2 1120.08,988.19 R1.1@1131.89,1000
NetQ1_2: Q1.2 R3.2 U3.19 | length 888.7
  Bottom Layer w10: U3.19 858.27,1409.56 858.27,1330.71 826.77,1299.21 826.77,1181.1 854.33,1153.54 854.33,937.01 887.8,903.54 Q1.2 966.54,903.54 988.19,925.2 988.19,972.44 1017.72,1001.97 R3.2@1074.8,1001.97
NetQ2_1: Q2.1 R8.1 R9.2 | length 145.5
  Bottom Layer w10: Q2.1 1118.11,1102.36 R9.2 1120.08,1145.67 R8.1@1131.89,1157.48
NetQ2_2: Q2.2 R10.2 U3.14 | length 632.3
  Bottom Layer w10: Q2.2 958.66,1064.96 992.13,1098.43 992.13,1163.39 ; R10.2@1074.8,1163.39 992.13,1163.39 ; U3.14 1122.05,1437.12 1122.05,1358.27 1066.93,1303.15 1011.81,1303.15 992.13,1283.46 992.13,1163.39
NetQ3_1: Q3.1 R14.1 R15.2 | length 145.5
  Bottom Layer w11.81: Q3.1 1118.11,1259.84 R15.2 1120.08,1303.15 R14.1@1131.89,1314.96
NetQ3_2: Q3.2 R16.2 U3.15 | length 437.5
  Bottom Layer w10: R16.2@866.14,1242.13 885.83,1222.44 Q3.2 954.72,1222.44 968.5,1236.22 968.5,1303.15 996.06,1330.71 1069.03,1330.71 1094.49,1356.16 1094.49,1420.14 U3.15
NetQ4_2: Q4.2 R20.2 U3.28 | length 1127.9
  Top Layer w8: v1(582.68,1527.56) 614.17,1527.56 638.01,1503.72 724.19,1503.72 822.83,1602.36 v1(874.02,1602.36)
  Bottom Layer w8: Q4.2 190.94,1360.24 216.54,1385.83 216.54,1452.76 244.09,1480.31 440.94,1480.31 475.02,1514.39 522.26,1514.39 535.44,1527.56 v1(582.68,1527.56)
  Bottom Layer w10: R20.2@78.74,1379.92 112.2,1379.92 131.89,1360.24 Q4.2 ; v1(874.02,1602.36) 874.02,1600.6 871.84,1598.43 858.27,1612 858.27,1633.86 893.44,1669.03 893.44,1699.43 871.15,1721.72 U3.28
NetR2_1: R2.1 X2.3 | length 207.4
  Bottom Layer w10: R2.1 1179.13,966.54 1228.35,1015.75 v1(1228.35,1125.98)
NetR4_2: R4.2 U3.26 | length 117.7
  Top Layer w10: v1(783.46,1732.28) 783.46,1728.35 795.28,1716.54 R4.2@795.28,1694.88
  Bottom Layer w10: v1(783.46,1732.28) 783.46,1728.35 832.03,1679.78 U3.26
NetR5_2: R5.2 U3.27 | length 103.6
  Top Layer w10: v1(822.83,1740.16) 838.58,1740.16 848.43,1750 R5.2@848.43,1775.59
  Bottom Layer w10: v1(822.83,1740.16) 822.83,1736.34 U3.27
NetR9_1: R9.1 X2.4 | length 120.8
  Bottom Layer w10: R9.1 1179.13,1120.08 1204.72,1145.67 1204.72,1177.17 v1(1228.35,1200.79)
NetR11_2: R11.2 U3.31 | length 85
  Bottom Layer w10: R11.2@883.86,1854.33 883.86,1853.48 U3.31
NetR12_1: R12.1 R13.1 X2.6 | length 463.2
  Top Layer w10: R12.1@1013.78,1631.89 1084.65,1631.89 1114.17,1602.36 1114.17,1413.39 1169.29,1358.27 X2.6@1252.95,1358.27
NetR15_1: R15.1 X2.5 | length 85.6
  Top Layer w10: v1(1224.41,1279.53) X2.5@1252.95,1279.53
  Bottom Layer w10: R15.1@1181.1,1255.91 R15.1 1202.76,1257.87 v1(1224.41,1279.53)
NetR17_1: R17.1 R18.1 X2.7 | length 286.3
  Top Layer w10: R17.1 1222.44,1631.89 ; X2.7@1252.95,1437.01 1252.95,1542.32 1222.44,1572.83 1222.44,1631.89 ; R18.1 1222.44,1631.89
NetU3_23: U3.23 X1.4 | length 498.5
  Bottom Layer w7.99: X1.4 606.69,1763.39 651.39,1718.69 706.49,1718.69 740.16,1685.03 740.16,1582.68 791.34,1531.5 802.03,1531.5 U3.23
NetU3_24: U3.24 X1.5 | length 456
  Bottom Layer w7.99: X1.5 530.32,1863.39 658.06,1735.64 712.16,1735.64 762.76,1685.04 763.78,1685.04 763.78,1629.75 U3.24
RFOUT: R21.2 RF1.6 U3.13 | length 2339.9
  Top Layer w10: v1(259.84,733.2) 256.82,733.2 207.41,683.79 207.41,398.89 240.16,366.14 RF1.6
  Bottom Layer w10: R21.2@139.76,366.14 RF1.6 ; v1(259.84,733.2) 259.84,741.99 364.31,846.46 1197.85,846.46 1258.34,906.95 1258.34,1345.37 U3.13
VIN: D1.1 X1.1 X2.1 | length 1617.9
  Top Layer w35.43: D1.1@492.13,915.35 498.03,921.26 822.83,921.26 866.14,964.57 885.83,964.57 ; X1.1 527.69,1437.66 832.96,1437.66 865.38,1405.24 865.38,1382.65 885.83,1362.2 885.83,964.57 ; X2.1@1252.95,964.57 885.83,964.57
pads on no net: FID1.1 FID2.1 U3.10 U3.11 U3.18 U3.21 U3.22 U3.25 X2.P1 X2.P2

## Polygon pours and split planes (outlines as drawn)
GND on Bottom Layer "GND-BOT" (hatched 90Degree grid 20 track 8, pour order 2): 0,1602.36 413.39,1602.36 413.39,2231.3 1358.27,2231.3 1358.27,696.85 374.02,696.85 374.02,0 0,0
GND on Top Layer "GND_L01_P010" (hatched 90Degree grid 20 track 8, pour order 10): 0,1602.36 413.39,1602.36 413.39,2232.28 1358.27,2232.28 1358.27,688.98 374.02,688.98 374.02,0 0,0

## Keep-outs
Top Layer:
  circle w3.94: c78.74,295.28 r49.21
Bottom Layer:
  circle w3.94: c78.74,259.84 r49.21

## Silkscreen, mask and mechanical layers (free items; w line width, h text height)
Top Overlay:
  circle w3.94: c122.05,122.05 r92.52
  circle w3.94: c1232.28,2106.3 r92.52
  circle w3.94: c535.43,2106.3 r66.93
Bottom Overlay:
  text "Control ID -  iDProx  - V2.4" at 1314.96,1303.15 h39.37 r90
  text "www.controlid.com.br" at 1220.47,826.77 h47.24
  text "AN/JM/AGN" at 334.65,283.46 h35.43
Mechanical 1:
  lines w1.97: 1299.21,688.98 1299.21,78.74 374.02,78.74 374.02,688.98 1299.21,688.98 ; 1299.21,688.98 1299.21,688.98 ; 0,0 0,1602.36 413.39,1602.36 413.39,2232.28 1358.27,2232.28 1358.27,688.98 1358.27,178.85 1358.27,0 374.02,0 0,0
  lines w3.94: 688.98,1072.42 cw(c720.47,1072.42) 720.47,1103.91 779.53,1103.91 cw(c779.53,1072.42) 811.02,1072.42 cw(c779.53,1072.42) 779.53,1040.92 720.47,1040.92 cw(c720.47,1072.42) 688.98,1072.42 ; 688.98,1368.53 cw(c720.47,1368.53) 720.47,1400.02 779.53,1400.02 cw(c779.53,1368.53) 811.02,1368.53 cw(c779.53,1368.53) 779.53,1337.03 720.47,1337.03 cw(c720.47,1368.53) 688.98,1368.53